# EAGLE board ASL1001 (EAGLE 6.2)
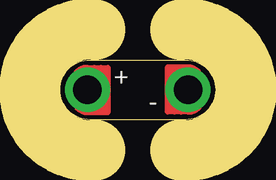
[diagram p0: board, top side]
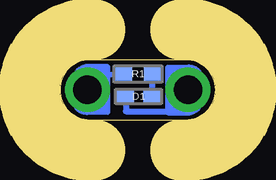
[diagram p1: board, bottom side, seen from below]

Size 6.5 x 2.5 mm. Coordinates in mm from the lower left corner, seen from the top.
Outline: 5.25,2.5 arc-180 5.25,0 1.25,0 arc-180 1.25,2.5 5.25,2.5
Copper layers (1*16): Top 0.035mm / dielectric 1.5mm / Bottom 0.035mm
Design rules: minimum track width 8mil, minimum drill 15mil, track to track 6mil, track to pad 6mil, pad to pad 6mil, via to via 6mil, smd to smd 6mil, copper to edge 6mil, drill to drill 8mil, minimum pad ring 8mil, minimum via ring 5mil, stop-mask expansion 4mil, vias tented up to drill 25mil, thermal gap 10mil
Milling: 2 lines

## Footprints (pad centres in the part's own frame; a part is rotated, then mirrored left to right if it is on the bottom)
0402_LED = smd 0.7 x 0.5: 1 -0.55,0; 2 0.55,0
0402 = smd 0.7 x 0.6: 1 -0.6,0; 2 0.6,0
SEWTAP_TH_0402 = drill 1.2 pad 1.867: 1 0,0

## Placement (x,y rotation side)
D1  GREEN  [0402_LED]  3.21,0.97 0 bottom
R1  300  [0402]  3.24,1.91 180 bottom
U$1  SEWTABTH_0402  [SEWTAP_TH_0402]  5.35,1.25 180 top
U$6  [DOCFIELD-TINYCIRCUITS-PCB]  27.25,-18.75 0 top  (outside the outline)
U$7  SEWTABTH_0402  [SEWTAP_TH_0402]  1.15,1.25 0 top

## Library data of the parts
D1 = tinycircuits; PARTNO: AS-ITM-00038
R1 = tinycircuits; PARTNO: AS-ITM-00016
U$1 U$7 = tinycircuits; BOM: EXCLUDE; DATABASE: ./../../../../../Components/TinyCircuits_Part_Database.txt; DNP: T
U$6 = tinycircuits; NO_BOM: TRUE

## Nets
+: D1.1 U$7.1
-: R1.2 U$1.1
N$2: D1.2 R1.1

## Tracks (layer width: path | path; a pad name or v marks a point on that pad's centre or on a via)
+
  Bottom 0.254: D1.1 3.75,0.81 3.75,0.35 1.75,0.35 1.15,1.35 1.09,1.41 U$7.1
-
  Bottom 0.254: U$1.1 4.94,1.86 R1.2
N$2
  Bottom 0.254: R1.1 2.66,1.84 D1.2

## Text on the board
tPlace: + | -
Document: FABRICATION DRAWING | NOTES: | 1. PRINTED CIRCUIT BOARD MADE FROM NEMA GRADE FR-4 EPOXY LAMINATE | WITH 1 OUNCE COPPER PLATING AND .024 THICKNESS. | 2. ALL DIMENSIONS ARE GIVEN IN INCHES. | 3. CIRCUIT PATHS ARE FOR REFERENCE ONLY. | 4. HOLE SIZES SHOWN ARE FINISHED DIAMETERS AFTER PLATING. | 5. BOARD PLATED USING REFLOW OR SIMILAR METHOD. | 6. BOARD TO HAVE BLUE SOLDER MASK ON PLATED SURFACES USING WET FILM | 7. SILKSCREEN BOARD USING WHITE INK. | SR100 OR SR1010 EPOXY. EQUIVALENT WET OR DRY FILM MAY BE USED. | 8. THE FOLLOWING INFORMATION APPLIES TO THIS BOARD: | * 2 COPPER LAYERS | * .024 BOARD THICKNESS | * REQUIRES TOP SIDE SILKSCREEN | Released under the Creative Commons Attribution Share-Alike 3.0 License | http://creativecommons.org/licenses/by-sa/3.0 | LilyPad Arduino Design by Leah Buechley and Sparkfun Electronics | Original Arduino Uno Design by Team Arduino | TinyDuino, TinyLily and TinyShield Designs by TinyCircuits | TinyLily LED - 0402 | AS-PCB-ASL1001 | 1